# EAGLE board pb_debug (EAGLE 6.3)

Size 57.15 x 25.4 mm. Coordinates in mm from the lower left corner, seen from the top.
Outline: 0,0 57.15,0 57.15,25.4 0,25.4 0,0
Copper layers (1*16): Top 0.035mm / dielectric 1.5mm / Bottom 0.035mm
Design rules "default": minimum track width 10mil, minimum drill 24mil, track to track 8mil, track to pad 8mil, pad to pad 8mil, via to via 8mil, smd to smd 8mil, copper to edge 40mil, drill to drill 8mil, minimum pad ring 10mil, minimum via ring 8mil, stop-mask expansion 4mil, vias tented up to drill 0mil, thermal gap 10mil

## Footprints (pad centres in the part's own frame; a part is rotated, then mirrored left to right if it is on the bottom)
C0603 = smd 1.1 x 1: 1 -0.85,0; 2 0.85,0
MA14-JTAG = drill 1: !RST! -1.27,-5.08; GND -1.27,-2.54; NC@1 -1.27,-7.62; NC@2 1.27,2.54; NC@3 1.27,-2.54; NC@4 1.27,-5.08; NC@5 1.27,-7.62; TCK -1.27,0; TDI -1.27,5.08; TDO -1.27,7.62; TEST 1.27,0; TMS -1.27,2.54; VCC_TARGET 1.27,5.08; VCC_TOOL 1.27,7.62
R0603 = smd 1 x 1.1: 1 -0.85,0; 2 0.85,0
MA06-1_1MM27_LONG = smd 2 x 0.635: P1 0,3.175; P2 0,1.905; P3 0,0.635; P4 0,-0.635; P5 0,-1.905; P6 0,-3.175
MA12-1_1MM27_LONG = smd 2 x 0.635: P1 0,6.985; P2 0,5.715; P3 0,4.445; P4 0,3.175; P5 0,1.905; P6 0,0.635; P7 0,-0.635; P8 0,-1.905; P9 0,-3.175; P10 0,-4.445; P11 0,-5.715; P12 0,-6.985
MA06-2 = drill 1.016 octagon: 1 -6.35,-1.27; 2 -6.35,1.27; 3 -3.81,-1.27; 4 -3.81,1.27; 5 -1.27,-1.27; 6 -1.27,1.27; 7 1.27,-1.27; 8 1.27,1.27; 9 3.81,-1.27; 10 3.81,1.27; 11 6.35,-1.27; 12 6.35,1.27
TP_MULT = drill 1.6: P$1 0,0
TP = drill 1.029: P$1 0,0
SC70-5 = smd 0.55 x 0.35: P1 -0.95,0.65; P2 -0.95,0; P3 -0.95,-0.65; P4 0.95,-0.65; P5 0.95,0.65

## Placement (x,y rotation side)
C1  0.1uF  [C0603]  -41.91,-34.29 0 top  (outside the outline)
J1  JTAG_14PIN_FULL  [MA14-JTAG]  -17.78,13.97 0 top  (outside the outline)
R1  0  [R0603]  -41.91,-2.54 0 top  (outside the outline)
R2  0  [R0603]  -41.91,-6.35 0 top  (outside the outline)
R3  0  [R0603]  -41.91,-10.16 0 top  (outside the outline)
R4  10k  [R0603]  -41.91,-45.72 0 top  (outside the outline)
R5  10k  [R0603]  -41.91,-49.53 0 top  (outside the outline)
R6  10  [R0603]  -41.91,-53.34 0 top  (outside the outline)
R7  10  [R0603]  -41.91,-57.15 0 top  (outside the outline)
SV1  [MA06-1_1MM27_LONG]  50.8,36.83 90 bottom  (outside the outline)
SV2  [MA12-1_1MM27_LONG]  20.32,29.21 90 bottom  (outside the outline)
SV3  [MA06-2]  -21.59,31.75 0 top  (outside the outline)
TP1  TP_MULT  [TP_MULT]  -27.94,38.1 0 top  (outside the outline)
TP2  TP_MULT  [TP_MULT]  -33.02,38.1 0 top  (outside the outline)
TP3  TP_MULT  [TP_MULT]  -38.1,38.1 0 top  (outside the outline)
TP4  TP_MULT  [TP_MULT]  -16.51,44.45 0 top  (outside the outline)
TP5  TP_MULT  [TP_MULT]  -21.59,44.45 0 top  (outside the outline)
TP6  TP_MULT  [TP_MULT]  -26.67,44.45 0 top  (outside the outline)
TP7  TP_MULT  [TP_MULT]  -31.75,44.45 0 top  (outside the outline)
TP8  TP_MULT  [TP_MULT]  -36.83,44.45 0 top  (outside the outline)
TP9  TP_MULT  [TP_MULT]  -41.91,44.45 0 top  (outside the outline)
TP10  TP_MULT  [TP_MULT]  -39.37,29.21 0 top  (outside the outline)
TP11  TP_MULT  [TP_MULT]  -22.86,38.1 0 top  (outside the outline)
TP12  TP_MULT  [TP_MULT]  -16.51,38.1 0 top  (outside the outline)
TP13  TP_STD  [TP]  -41.91,-16.51 0 top  (outside the outline)
TP14  TP_STD  [TP]  -41.91,-21.59 0 top  (outside the outline)
TP15  TP_STD  [TP]  -41.91,-26.67 0 top  (outside the outline)
TP16  TP_MULT  [TP_MULT]  -41.91,-40.64 0 top  (outside the outline)
U1  MAX9910  [SC70-5]  -41.91,-30.48 0 top  (outside the outline)

## Library data of the parts
C1 R1-R7 = rcl
J1 = ibat; DIGIKEY: HRP14H-ND
SV1 SV2 = con-lstb
SV3 = con-lstb; OC_FARNELL: unknown; OC_NEWARK: unknown
TP1-TP16 = skyspecs
U1 = powerfilm; DIGIKEY: MAX9910EXK+TCT-ND

## Nets
!RST!: J1.!RST! SV3.3
+3V3: C1.1 J1.VCC_TARGET R2.2 R7.1 TP14.P$1 U1.P5
GND: C1.2 J1.GND R3.2 R5.2 TP15.P$1 U1.P2
N$1: R1.1 SV2.P12 TP1.P$1
N$2: SV2.P11 TP2.P$1
N$3: SV2.P10 TP3.P$1
N$4: SV2.P9 TP4.P$1
N$5: R2.1 SV2.P8 TP5.P$1
N$6: R3.1 SV2.P7 TP6.P$1
N$7: SV1.P6 SV3.12
N$8: SV2.P6 TP7.P$1
N$9: SV2.P5 TP8.P$1
N$10: SV2.P4 TP9.P$1
N$11: SV2.P3 TP10.P$1
N$12: SV2.P2 TP11.P$1
N$13: SV2.P1 TP12.P$1
N$14: SV1.P5 SV3.10
N$15: SV1.P4 SV3.8
N$16: SV1.P3 SV3.6
N$17: SV1.P2 SV3.4
N$18: SV1.P1 SV3.2
N$19: R5.1 R6.2 U1.P1
N$20: R4.1 R7.2 U1.P3
N$21: R4.2 TP16.P$1 U1.P4
TCK: J1.TCK SV3.5
TDI: J1.TDI SV3.9
TDO: J1.TDO SV3.11
TEST: J1.TEST SV3.1
TMS: J1.TMS SV3.7
V+: R1.2 R6.1 TP13.P$1

## Tracks (layer width: path | path; a pad name or v marks a point on that pad's centre or on a via)
!RST!  (1 unrouted)
+3V3  (5 unrouted)
GND  (5 unrouted)
N$1  (2 unrouted)
N$2  (1 unrouted)
N$3  (1 unrouted)
N$4  (1 unrouted)
N$5  (2 unrouted)
N$6  (2 unrouted)
N$7  (1 unrouted)
N$8  (1 unrouted)
N$9  (1 unrouted)
N$10  (1 unrouted)
N$11  (1 unrouted)
N$12  (1 unrouted)
N$13  (1 unrouted)
N$14  (1 unrouted)
N$15  (1 unrouted)
N$16  (1 unrouted)
N$17  (1 unrouted)
N$18  (1 unrouted)
N$19  (2 unrouted)
N$20  (2 unrouted)
N$21  (2 unrouted)
TCK  (1 unrouted)
TDI  (1 unrouted)
TDO  (1 unrouted)
TEST  (1 unrouted)
TMS  (1 unrouted)
V+  (2 unrouted)